# EAGLE board CT_schematic (EAGLE 7.6.0)

Size 100 x 80 mm. Coordinates in mm from the lower left corner, seen from the top.
Outline: 0,0 100,0 100,80 0,80 0,0
Copper layers (1*16): Top 0.035mm / dielectric 1.5mm / Bottom 0.035mm
Design rules "default": minimum track width 10mil, minimum drill 24mil, track to track 8mil, track to pad 8mil, pad to pad 8mil, via to via 8mil, smd to smd 8mil, copper to edge 40mil, drill to drill 8mil, minimum pad ring 10mil, minimum via ring 8mil, stop-mask expansion 4mil, vias tented up to drill 0mil, thermal gap 10mil

## Footprints (pad centres in the part's own frame; a part is rotated, then mirrored left to right if it is on the bottom)
C0603 = smd 0.8 x 0.8: 1 -0.762,0; 2 0.762,0
C0402 = smd 0.5 x 0.5: 1 -0.508,0; 2 0.508,0
C1210 = smd 1.2 x 2.5: 1 -1.524,0; 2 1.524,0
EXV-9H = smd 3.505 x 1.676: 1 -2.857,0; 2 2.857,0
L0603 = smd 0.8 x 0.8: 1 -0.762,0; 2 0.762,0
PJ-037B_PACKAGE = drill 3.7 square: 1 12,0 | drill 3.2 square: 2 6,0
R0603 = smd 0.8 x 0.8: 1 -0.762,0; 2 0.762,0
TFBGA64 = smd 0.35 x 0.35: A1 -1.75,1.75; A2 -1.25,1.75; A3 -0.75,1.75; A4 -0.25,1.75; A5 0.25,1.75; A6 0.75,1.75; A7 1.25,1.75; A8 1.75,1.75; B1 -1.75,1.25; B2 -1.25,1.25; B3 -0.75,1.25; B4 -0.25,1.25; B5 0.25,1.25; B6 0.75,1.25; B7 1.25,1.25; B8 1.75,1.25; C1 -1.75,0.75; C2 -1.25,0.75; C3 -0.75,0.75; C4 -0.25,0.75; C5 0.25,0.75; C6 0.75,0.75; C7 1.25,0.75; C8 1.75,0.75; D1 -1.75,0.25; D2 -1.25,0.25; D3 -0.75,0.25; D4 -0.25,0.25; D5 0.25,0.25; D6 0.75,0.25; D7 1.25,0.25; D8 1.75,0.25; E1 -1.75,-0.25; E2 -1.25,-0.25; E3 -0.75,-0.25; E4 -0.25,-0.25; E5 0.25,-0.25; E6 0.75,-0.25; E7 1.25,-0.25; E8 1.75,-0.25; F1 -1.75,-0.75; F2 -1.25,-0.75; F3 -0.75,-0.75; F4 -0.25,-0.75; F5 0.25,-0.75; F6 0.75,-0.75; F7 1.25,-0.75; F8 1.75,-0.75; G1 -1.75,-1.25; G2 -1.25,-1.25; G3 -0.75,-1.25; G4 -0.25,-1.25; G5 0.25,-1.25; G6 0.75,-1.25; G7 1.25,-1.25; G8 1.75,-1.25; H1 -1.75,-1.75; H2 -1.25,-1.75; H3 -0.75,-1.75; H4 -0.25,-1.75; H5 0.25,-1.75; H6 0.75,-1.75; H7 1.25,-1.75; H8 1.75,-1.75
TST-110-05-T-D-RA = drill 1 pad 1.7 square: 1 0,0 | drill 1 pad 1.7: 2 0,2.54; 3 2.54,0; 4 2.54,2.54; 5 5.08,0; 6 5.08,2.54; 7 7.62,0; 8 7.62,2.54; 9 10.16,0; 10 10.16,2.54; 11 12.7,0; 12 12.7,2.54; 13 15.24,0; 14 15.24,2.54; 15 17.78,0; 16 17.78,2.54; 17 20.32,0; 18 20.32,2.54; 19 22.86,0; 20 22.86,2.54
ASEK = smd 1.4 x 1: 1 -1.1,-0.8; 2 1.1,-0.8; 3 1.1,0.8; 4 -1.1,0.8
ASFL1 = smd 1.7 x 1.5: 1 -1.27,-1.1; 2 1.27,-1.1; 3 1.27,1.1; 4 -1.27,1.1
WSON-8 = smd 0.3 x 0.6: 1 -0.75,0; 2 0.05,0; 3 0.85,0; 4 1.65,0; 5 1.65,3.8; 6 0.85,3.8; 7 0.05,3.8; 8 -0.75,3.8 | smd 3 x 2.6: PAD 0.45,1.9
SON-6 = smd 0.55 x 0.3: 1 -0.355,0.5 | smd 0.52 x 0.3: 2 -0.37,0; 3 -0.37,-0.5; 4 0.37,-0.5; 5 0.37,0; 6 0.37,0.5
SW_4-1437565-2 = smd 1.4 x 2.1: 1 -2.23,4.55; 2 -2.23,-4.55; 3 2.23,4.55; 4 2.23,-4.55
LGM67K-G1J2-24-Z = smd 0.8 x 1.4: A -2,0; C 0,0
NC7SZ125M5X = smd 1.3 x 0.7: 1 -1.3,0.95; 2 -1.3,0; 3 -1.3,-0.95; 4 1.3,-0.95; 5 1.3,0.95
DUMMY_PACKAGE_110 = drill 0.3: 1 0,-1; 2 1.5,-1; 3 3,-1

## Placement (x,y rotation side)
C1  1e-06  [C0603]  -19.05,54.61 0 top  (outside the outline)
C2  1e-07  [C0603]  -22.86,54.61 0 top  (outside the outline)
C3  1e-07  [C0603]  -26.67,54.61 0 top  (outside the outline)
C4  1e-07  [C0603]  -30.48,54.61 0 top  (outside the outline)
C5  1e-07  [C0603]  -34.29,54.61 0 top  (outside the outline)
C6  1e-07  [C0603]  -38.1,54.61 0 top  (outside the outline)
C7  4.7e-06  [C0603]  -15.24,54.61 0 top  (outside the outline)
C8  1e-08  [C0603]  -41.91,54.61 0 top  (outside the outline)
C9  1e-08  [C0603]  -45.72,54.61 0 top  (outside the outline)
C10  1e-06  [C0603]  -49.53,54.61 0 top  (outside the outline)
C11  1e-07  [C0402]  -26.67,59.69 0 top  (outside the outline)
C12  1e-07  [C0402]  -30.48,59.69 0 top  (outside the outline)
C13  1e-08  [C0402]  -34.29,59.69 0 top  (outside the outline)
C14  1e-08  [C0402]  -38.1,59.69 0 top  (outside the outline)
C15  1e-08  [C0402]  -41.91,59.69 0 top  (outside the outline)
C16  1e-05  [C1210]  -29.21,43.18 0 top  (outside the outline)
C17  1e-05  [C1210]  -35.56,43.18 0 top  (outside the outline)
C18  1e-07  [C0402]  -45.72,59.69 0 top  (outside the outline)
C19  0.0001  [EXV-9H]  -38.1,35.56 0 top  (outside the outline)
C20  0.0001  [EXV-9H]  -49.53,35.56 0 top  (outside the outline)
C21  1e-08  [C0402]  -49.53,59.69 0 top  (outside the outline)
C22  1e-08  [C0402]  -53.34,59.69 0 top  (outside the outline)
F1  240.0  [L0603]  -53.34,54.61 0 top  (outside the outline)
J1  PJ-037B  [PJ-037B_PACKAGE]  -27.94,7.62 0 top  (outside the outline)
R2  1000.0  [R0603]  -57.15,54.61 0 top  (outside the outline)
R4  4700.0  [R0603]  -60.96,54.61 0 top  (outside the outline)
R5  10000.0  [R0603]  -20.32,49.53 0 top  (outside the outline)
R6  10000.0  [R0603]  -25.4,49.53 0 top  (outside the outline)
R7  10000.0  [R0603]  -30.48,49.53 0 top  (outside the outline)
R8  10000.0  [R0603]  -35.56,49.53 0 top  (outside the outline)
R9  10000.0  [R0603]  -40.64,49.53 0 top  (outside the outline)
R10  10000.0  [R0603]  -45.72,49.53 0 top  (outside the outline)
R11  10000.0  [R0603]  -50.8,49.53 0 top  (outside the outline)
R12  100000.0  [R0603]  -53.34,41.91 0 top  (outside the outline)
R13  2231.0  [R0603]  -15.24,59.69 0 top  (outside the outline)
R14  1000.0  [R0603]  -19.05,59.69 0 top  (outside the outline)
R15  10000.0  [R0603]  -55.88,49.53 0 top  (outside the outline)
R16  10000.0  [R0603]  -60.96,49.53 0 top  (outside the outline)
R17  9100.0  [R0603]  -22.86,59.69 0 top  (outside the outline)
R18  680000.0  [R0603]  -58.42,41.91 0 top  (outside the outline)
R19  120000.0  [R0603]  -15.24,49.53 0 top  (outside the outline)
U1  stm32f100r6h6  [TFBGA64]  -58.42,5.08 0 top  (outside the outline)
U2  TST-110-05-T-D-RA  [TST-110-05-T-D-RA]  -46.99,25.4 0 top  (outside the outline)
U3  ASEK-32.768KHz-ECST  [ASEK]  -29.21,35.56 0 top  (outside the outline)
U4  ASFL1-25MHZ-NCS  [ASFL1]  -46.99,19.05 0 top  (outside the outline)
U5  LP3878SDX-ADJ/NOPB  [WSON-8]  -30.48,17.78 0 top  (outside the outline)
U6  TPS3895ADRYR  [SON-6]  -13.97,63.5 0 top  (outside the outline)
U7  4-1437565-2  [SW_4-1437565-2]  -44.45,6.35 0 top  (outside the outline)
U8  Q65110A2395  [LGM67K-G1J2-24-Z]  -17.78,43.18 0 top  (outside the outline)
U9  nc7sz125m5x  [NC7SZ125M5X]  -40.64,41.91 0 top  (outside the outline)
U10  nc7sz125m5x  [NC7SZ125M5X]  -46.99,41.91 0 top  (outside the outline)
U11  Dummy  [DUMMY_PACKAGE_110]  -59.69,59.69 0 top  (outside the outline)

## Library data of the parts
C1-C22 F1 J1 R2 R4-R19 U1-U11 = circuit_tree

## Nets
CLK_U1_A1: U1.A1 U3.3
CLK_U1_C1: U1.C1 U4.3
GND: C1.2 C2.2 C3.2 C4.2 C5.2 C6.2 C7.2 C8.2 C9.2 C10.2 C11.2 C12.2 C13.2 C14.2 C15.2 C16.2 C17.2 C18.2 C19.2 C20.2 C21.2 C22.2 J1.2 R2.2 R5.2 R11.2 R14.2 R17.2 R19.2 U1.C2 U1.D4 U1.D5 U1.D6 U1.F1 U2.4 U2.6 U2.8 U2.10 U2.12 U2.14 U2.16 U2.18 U2.20 U3.2 U4.2 U5.3 U5.PAD U6.2 U8.C U9.2 U9.3 U10.1 U10.3 U11.1
NET_U1_B4: R5.1 U1.B4
NET_U1_E1: R4.1 U1.E1 U10.4
NET_U1_H1: C8.1 C9.1 C10.1 F1.1 U1.G1 U1.H1
NET_U1_H7: U8.A
NET_U1_H8: U7.3 U7.4
NET_U2_3: R6.1 U2.3
NET_U2_7: R8.1 U2.7
NET_U2_9: R9.1 U2.9
NET_U2_19: R11.1 U2.19
NET_U5_1: C15.1 U5.1
NET_U5_6: R13.2 R14.1 U5.6
NET_U5_8: R12.1 U5.8
NET_U6_1: R16.1 R17.1 U6.1
NET_U6_3: R18.2 R19.1 U6.3
NET_U6_4: R15.1 U6.4 U9.4 U10.2
NET_U7_1: R2.1 U7.1 U7.2
PROC_SYS_JTDI: R7.1 U1.A6 U2.5
PROC_SYS_JTDO_TRACESWO: U1.A5 U2.13
PROC_TIM1_CH2: U1.C7 U11.3
PROC_TIM1_CH4: U1.C8 U11.2
RST_OUT_U2_SRESET_B: R10.1 U2.15 U9.1
VCC_S1_15V8: C16.1 C19.1 C20.1 J1.1 R12.2 U5.4
VCC_TIER1_3V3: C1.1 C2.1 C3.1 C4.1 C5.1 C6.1 C7.1 C11.1 C12.1 C13.1 C14.1 C17.1 C18.1 C21.1 C22.1 F1.2 R4.2 R6.2 R7.2 R8.2 R9.2 R10.2 R13.1 R15.2 R16.2 R18.1 U1.B2 U1.D2 U1.E4 U1.E5 U1.E6 U2.1 U2.2 U3.4 U4.4 U5.5 U6.6 U9.5 U10.5

## Tracks (layer width: path | path; a pad name or v marks a point on that pad's centre or on a via)
CLK_U1_A1  (1 unrouted)
CLK_U1_C1  (1 unrouted)
GND  (53 unrouted)
NET_U1_B4  (1 unrouted)
NET_U1_E1  (2 unrouted)
NET_U1_H1  (5 unrouted)
NET_U1_H8  (1 unrouted)
NET_U2_3  (1 unrouted)
NET_U2_7  (1 unrouted)
NET_U2_9  (1 unrouted)
NET_U2_19  (1 unrouted)
NET_U5_1  (1 unrouted)
NET_U5_6  (2 unrouted)
NET_U5_8  (1 unrouted)
NET_U6_1  (2 unrouted)
NET_U6_3  (2 unrouted)
NET_U6_4  (3 unrouted)
NET_U7_1  (2 unrouted)
PROC_SYS_JTDI  (2 unrouted)
PROC_SYS_JTDO_TRACESWO  (1 unrouted)
PROC_TIM1_CH2  (1 unrouted)
PROC_TIM1_CH4  (1 unrouted)
RST_OUT_U2_SRESET_B  (2 unrouted)
VCC_S1_15V8  (5 unrouted)
VCC_TIER1_3V3  (38 unrouted)